# EAGLE board PCB_TA (EAGLE 9.6.2)
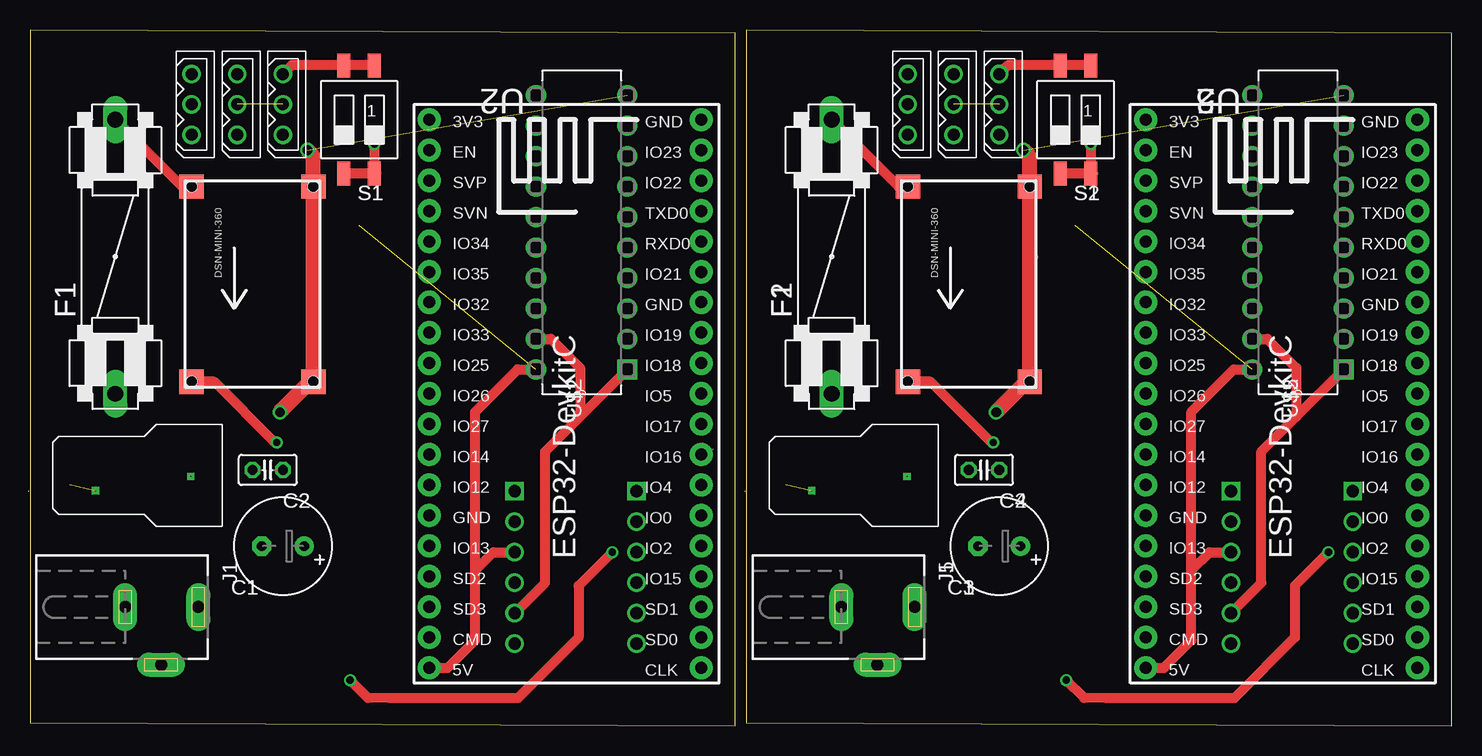
[diagram p0: board, top side]
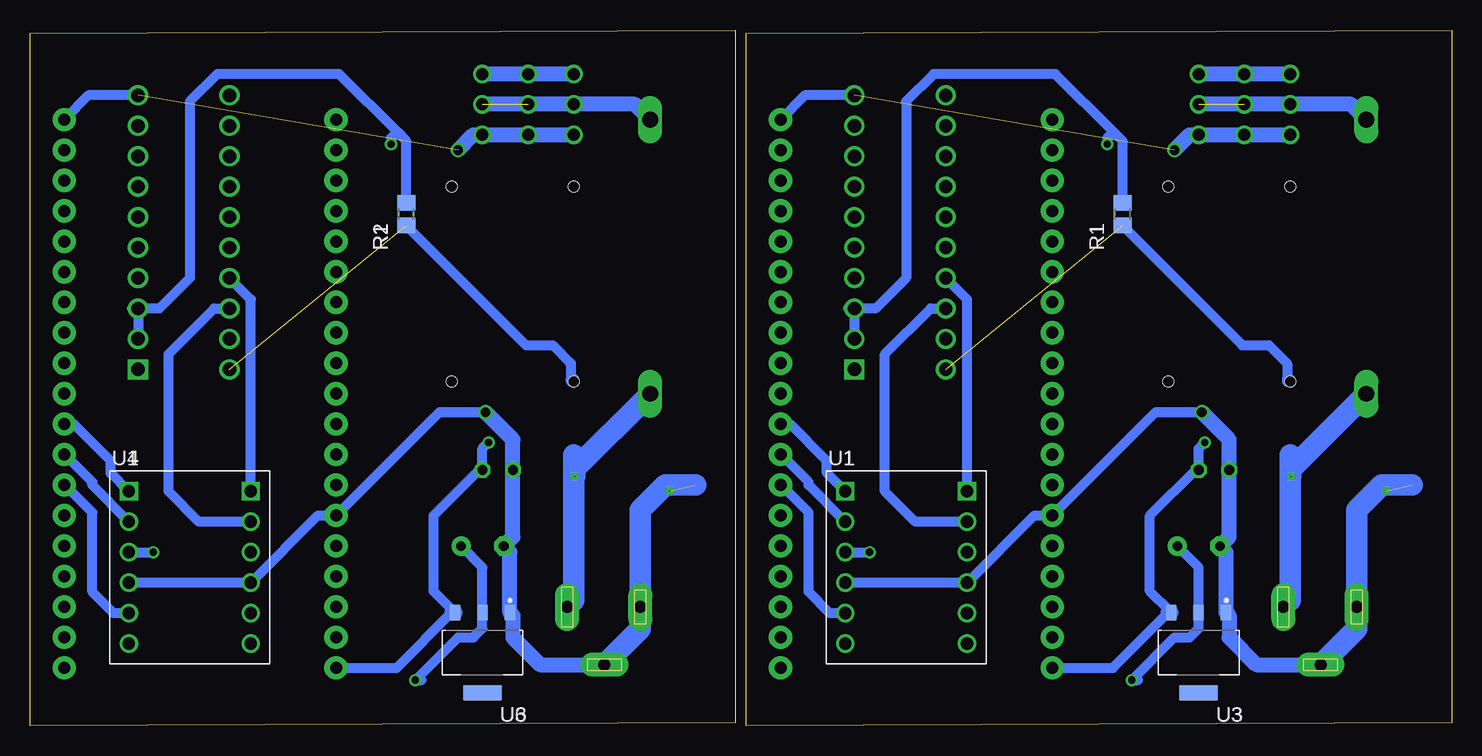
[diagram p1: board, bottom side, seen from below]

Size 118.48 x 58.02 mm. Coordinates in mm from the lower left corner, seen from the top.
Outline: 0,0.25 58.79,0 58.79,57.77 0,58.02 0,0.25
Outline: 59.69,0.25 118.48,0 118.48,57.77 59.69,58.02 59.69,0.25
Copper layers (1*16): Top 0.035mm / dielectric 1.5mm / Bottom 0.035mm
Design rules "default": minimum track width 6mil, minimum drill 0.35mm, track to track 6mil, track to pad 6mil, pad to pad 6mil, via to via 6mil, smd to smd 6mil, copper to edge 40mil, drill to drill 6mil, minimum pad ring 10mil, minimum via ring 8mil, stop-mask expansion 4mil, vias tented up to drill 0mil, thermal gap 10mil
Holes 0.9 mm at 13.46,28.7 13.46,44.96 23.62,44.96 23.62,28.7 73.15,28.7 73.15,44.96 83.31,44.96 83.31,28.7

## Footprints (pad centres in the part's own frame; a part is rotated, then mirrored left to right if it is on the bottom)
E3,5-8 = drill 0.813 pad 1.6: + -1.778,0 | drill 0.813 pad 1.6 octagon: - 1.778,0
C025-025X050 = drill 0.813 octagon: 1 -1.27,0; 2 1.27,0
FUSE = drill 1.321 long: 1 -11.43,0; 2 11.43,0
DCJ0202 = drill 1 pad 2 long: 1 0,3.1; 2 4.8,0; 3 0,-3
5267-3 = drill 1: 1 0,0; 2 -2.54,0; 3 -5.08,0
R0805 = smd 1.3 x 1.5: 1 -0.95,0; 2 0.95,0
SMS-002 = smd 1.092 x 2.007: 1 -1.27,-4.496; 2 1.27,-4.496; 3 1.27,4.496; 4 -1.27,4.496
CONV_BOB-12009 = drill 1.016: GND_1 5.08,-1.27; GND_2 -5.08,-1.27; HV 5.08,1.27; HV2 5.08,3.81; HV3 5.08,-3.81; HV4 5.08,-6.35; LV -5.08,1.27; LV2 -5.08,3.81; LV3 -5.08,-3.81; LV4 -5.08,-6.35 | drill 1.016 square: HV1 5.08,6.35; LV1 -5.08,6.35
DIP254P762X508-20 = drill 1.118 square: 1 -7.62,22.86 | drill 1.118: 2 -7.62,20.32; 3 -7.62,17.78; 4 -7.62,15.24; 5 -7.62,12.7; 6 -7.62,10.16; 7 -7.62,7.62; 8 -7.62,5.08; 9 -7.62,2.54; 10 -7.62,0; 11 0,0; 12 0,2.54; 13 0,5.08; 14 0,7.62; 15 0,10.16; 16 0,12.7; 17 0,15.24; 18 0,17.78; 19 0,20.32; 20 0,22.86
SOT229P700X180-4N = smd 0.93 x 1.31: 1 -2.29,-3.345; 2 0,-3.345; 3 2.29,-3.345 | smd 3.24 x 1.31: 4 0,3.345
T_PLUG_CONNECTOR = drill 0.1 square: P-1 2.6,4.35; P-2 10.55,5.55
ESP32-DEVKITC = drill 1 pad 1.93: 1 -22.87,-11.42; 2 -20.33,-11.42; 3 -17.79,-11.42; 4 -15.25,-11.42; 5 -12.71,-11.42; 6 -10.17,-11.42; 7 -7.63,-11.42; 8 -5.09,-11.42; 9 -2.55,-11.42; 10 -0.01,-11.42; 11 2.53,-11.42; 12 5.07,-11.42; 13 7.61,-11.42; 14 10.15,-11.42; 15 12.69,-11.42; 16 15.23,-11.42; 17 17.77,-11.42; 18 20.31,-11.42; 19 22.85,-11.42; 20 22.85,11.23; 21 20.31,11.23; 22 17.77,11.23; 23 15.23,11.23; 24 12.69,11.23; 25 10.15,11.23; 26 7.61,11.23; 27 5.07,11.23; 28 2.53,11.23; 29 -0.01,11.23; 30 -2.55,11.23; 31 -5.09,11.23; 32 -7.63,11.23; 33 -10.17,11.23; 34 -12.71,11.23; 35 -15.25,11.23; 36 -17.79,11.23; 37 -20.33,11.23; 38 -22.87,11.23
DC-DC_CONV = smd 2.032 x 2.032: 1 -5.08,8.128; 2 5.08,8.128; 3 -5.08,-8.128; 4 5.08,-8.128

## Placement (x,y rotation side)
C1  [E3,5-8]  21.08,14.99 180 top
C2  [C025-025X050]  19.81,21.34 180 top
C3  [E3,5-8]  80.77,14.99 180 top
C4  [C025-025X050]  79.5,21.34 180 top
F1  [FUSE]  7.11,39.12 90 top
F2  [FUSE]  66.8,39.12 90 top
J1  DCJ0202  [DCJ0202]  10.92,9.91 270 top
J2  22-03-5035  [5267-3]  13.46,49.28 270 top
J3  22-03-5035  [5267-3]  17.27,49.28 270 top
J4  22-03-5035  [5267-3]  21.08,49.28 270 top
J5  DCJ0202  [DCJ0202]  70.61,9.91 270 top
J6  22-03-5035  [5267-3]  73.15,49.28 270 top
J7  22-03-5035  [5267-3]  76.96,49.28 270 top
J8  22-03-5035  [5267-3]  80.77,49.28 270 top
R1  [R0805]  27.43,42.67 90 bottom
R2  [R0805]  87.12,42.67 90 bottom
S1  SWS002  [SMS-002]  27.43,50.55 180 top
S2  SWS002  [SMS-002]  87.12,50.55 180 top
U1  BOB-12009  [CONV_BOB-12009]  45.47,13.21 0 bottom
U2  SN74LS241N  [DIP254P762X508-20]  42.16,52.58 180 top
U3  AMS1117-3.3  [SOT229P700X180-4N]  21.08,6.1 180 bottom
U4  BOB-12009  [CONV_BOB-12009]  105.16,13.21 0 bottom
U5  SN74LS241N  [DIP254P762X508-20]  101.85,52.58 180 top
U6  AMS1117-3.3  [SOT229P700X180-4N]  80.77,6.1 180 bottom
U$1  T-PLUG_CONNECTOR  [T_PLUG_CONNECTOR]  16,25.15 180 top
U$2  ESP32DEVKITC  [ESP32-DEVKITC]  44.7,27.69 270 top
U$3  DC-DC_CONV  [DC-DC_CONV]  18.54,36.83 180 top
U$4  T-PLUG_CONNECTOR  [T_PLUG_CONNECTOR]  75.69,25.15 180 top
U$5  ESP32DEVKITC  [ESP32-DEVKITC]  104.39,27.69 270 top
U$6  DC-DC_CONV  [DC-DC_CONV]  78.23,36.83 180 top

## Library data of the parts
C1-C4 = rcl; SPICEPREFIX: C
F1 F2 = special
J1 J5 = con-jack; OC_FARNELL: unknown; OC_NEWARK: unknown
J2-J4 J6-J8 = molex
R1 R2 = rcl; SPICEPREFIX: R
S1 S2 = smd-special
U1 U4 = BOB-12009; AVAILABILITY: In Stock; DESCRIPTION: BSS138 Logic-Level Translator Interface Evaluation Board; MF: SparkFun; MP: BOB-12009; PACKAGE: None; PRICE: None; PURCHASE-URL: https://pricing.snapeda.com/search/part/BOB-12009/?ref=eda
U2 U5 = SN74LS241N; AVAILABILITY: In Stock; DESCRIPTION: 8-ch, 4.75-V to 5.25-V bipolar buffers with 3-state outputs; MF: Texas Instruments; MP: SN74LS241N; PACKAGE: PDIP-20 Texas Instruments; PRICE: None; PURCHASE-URL: https://pricing.snapeda.com/search/part/SN74LS241N/?ref=eda
U3 U6 = AMS1117-3.3; AVAILABILITY: Not in stock; DESCRIPTION: LDO Voltage Regulators 800MA LDO LINEAR REG; MF: Advanced Monolithic Systems; MP: AMS1117-3.3; PACKAGE: None; PRICE: None
U$1 U$4 = con-T-plug
U$2 U$5 = ESP32-DEVKITC
U$3 U$6 = devkrzyzanowskiLib

## Nets
3V1: C3.+ U4.LV U6.2
3V3: C1.+ U1.LV U3.2
5V: C2.1 R1.1 U1.HV U2.20 U3.3 U$2.19 U$3.2
5V1: C4.1 R2.1 U4.HV U5.20 U6.3 U$5.19 U$6.2
DATA: R1.2 S1.4 U2.2 U2.3
DATA1: R2.2 S2.4 U5.2 U5.3
DATA_P: J2.3 J3.3 J4.3 S1.1
DATA_P1: J6.3 J7.3 J8.3 S2.1
DXL_EN_A: U1.LV3 U$2.26
DXL_EN_A1: U4.LV3 U$5.26
DXL_EN_B: U1.HV3 U2.1 U2.19
DXL_EN_B1: U4.HV3 U5.1 U5.19
DXL_RX_A: U1.LV2 U$2.27
DXL_RX_A1: U4.LV2 U$5.27
DXL_RX_B: U1.HV2 U2.18
DXL_RX_B1: U4.HV2 U5.18
DXL_TX_A: U1.LV1 U$2.28
DXL_TX_A1: U4.LV1 U$5.28
DXL_TX_B: U1.HV1 U2.17
DXL_TX_B1: U4.HV1 U5.17
GND1: C3.- C4.2 J5.2 J5.3 J6.1 J7.1 J8.1 U4.GND_1 U4.GND_2 U5.10 U6.1 U$4.P-2 U$5.14 U$5.38 U$6.1 U$6.3
GND2: C1.- C2.2 J1.2 J1.3 J2.1 J3.1 J4.1 U1.GND_1 U1.GND_2 U2.10 U3.1 U$1.P-2 U$2.14 U$2.38 U$3.1 U$3.3
VCC: F1.2 J2.2 J3.2 J4.2 U$3.4
VCC1: F2.2 J6.2 J7.2 J8.2 U$6.4
VIN: F1.1 J1.1 U$1.P-1
VIN1: F2.1 J5.1 U$4.P-1

## Tracks (layer width: path | path; a pad name or v marks a point on that pad's centre or on a via)
3V1  (via drill 0.6)
  Top 0.813: v108.2,14.48 105.41,11.68 105.41,7.37 100.35,2.31 89.66,2.31 87.85,2.32 v86.36,3.81
  Bottom 0.813: U4.LV v108.2,14.48 | 85.85,3.81 v86.36,3.81 82.8,7.37 81.53,7.37 80.77,8.13 U6.2 80.77,13.21 C3.+
3V3  (via drill 0.6)
  Top 0.813: v48.51,14.48 45.72,11.68 45.72,7.37 40.66,2.31 29.97,2.31 28.16,2.32 v26.67,3.81
  Bottom 0.813: U1.LV v48.51,14.48 | 26.16,3.81 v26.67,3.81 23.11,7.37 21.84,7.37 21.08,8.13 U3.2 21.08,13.21 C1.+
5V  (via drill 0.6)  (1 unrouted)
  Top 0.813: v20.57,23.62 20.41,23.62 15.33,28.7 U$3.2 | U$2.19 34.81,4.84 37.08,7.11 37.08,12.95 | 37.08,12.95 38.61,14.48 U1.HV | 37.08,12.95 37.08,26.16 40.64,29.72 U2.20
  Bottom 0.813: U3.3 25.15,11.21 25.15,17.53 21.34,21.34 C2.1 21.08,23.11 v20.57,23.62 | U$2.19 28.23,4.84 23.63,9.44 | R1.1 17.46,31.75 15.24,31.75 13.72,30.23 13.72,28.96 | 13.72,28.96 13.72,28.7 U$3.2 13.46,28.96 13.72,28.96
  Bottom 1.27: 23.63,9.44 U3.3
5V1  (via drill 0.6)  (1 unrouted)
  Top 0.813: v80.26,23.62 80.1,23.62 75.02,28.7 U$6.2 | U$5.19 94.5,4.84 96.77,7.11 96.77,12.95 | 96.77,12.95 98.3,14.48 U4.HV | 96.77,12.95 96.77,26.16 100.33,29.72 U5.20
  Bottom 0.813: U6.3 84.84,11.21 84.84,17.53 81.03,21.34 C4.1 80.77,23.11 v80.26,23.62 | U$5.19 87.92,4.84 83.32,9.44 | R2.1 77.15,31.75 74.93,31.75 73.41,30.23 73.41,28.96 | 73.41,28.96 73.41,28.7 U$6.2 73.15,28.96 73.41,28.96
  Bottom 1.27: 83.32,9.44 U6.3
DATA  (via drill 0.6)
  Top 0.813: S1.4 28.88,46.05 | S1.4 26.34,46.05 26.16,46.23 26.29,46.35 26.54,46.1 | v28.7,48.51 S1.4
  Bottom 0.813: U2.3 U2.2 | U2.3 48.01,34.8 45.47,37.34 45.47,52.07 43.18,54.36 33.02,54.36 28.19,49.53 | 50.29,34.8 U2.3 | R1.2 27.43,48.77 28.19,49.53 | 28.19,49.53 28.7,49.02 v28.7,48.51
DATA1  (via drill 0.6)
  Top 0.813: S2.4 88.57,46.05 | S2.4 86.03,46.05 85.85,46.23 85.98,46.35 86.23,46.1 | v88.39,48.51 S2.4
  Bottom 0.813: U5.3 U5.2 | U5.3 107.7,34.8 105.16,37.34 105.16,52.07 102.87,54.36 92.71,54.36 87.88,49.53 | 109.98,34.8 U5.3 | R2.2 87.12,48.77 87.88,49.53 | 87.88,49.53 88.39,49.02 v88.39,48.51
DATA_P
  Top 0.813: J4.3 21.84,55.12 28.63,55.12 S1.1
  Bottom 1.27: J2.3 J3.3 J4.3
DATA_P1
  Top 0.813: J8.3 81.53,55.12 88.32,55.12 S2.1
  Bottom 1.27: J6.3 J7.3 J8.3
DXL_EN_A
  Bottom 0.813: U1.LV3 51.82,9.4 53.59,11.18 53.59,17.78 55.89,20.08 U$2.26
DXL_EN_A1
  Bottom 0.813: U4.LV3 111.51,9.4 113.28,11.18 113.28,17.78 115.58,20.08 U$5.26
DXL_EN_B
  Top 0.813: U1.HV3 42.93,11.94 42.93,22.86 45.85,25.78 | 45.85,25.78 U2.1 | U2.19 43.43,32.26 45.85,29.85 45.85,25.78
DXL_EN_B1
  Top 0.813: U4.HV3 102.62,11.94 102.62,22.86 105.54,25.78 | 105.54,25.78 U5.1 | U5.19 103.12,32.26 105.54,29.85 105.54,25.78
DXL_RX_A
  Bottom 0.813: U1.LV2 53.59,20.07 53.59,20.32 55.89,22.62 U$2.27
DXL_RX_A1
  Bottom 0.813: U4.LV2 113.28,20.07 113.28,20.32 115.58,22.62 U$5.27
DXL_RX_B
  Bottom 0.813: U1.HV2 44.7,17.02 47.24,19.56 47.24,30.99 43.43,34.8 U2.18
DXL_RX_B1
  Bottom 0.813: U4.HV2 104.39,17.02 106.93,19.56 106.93,30.99 103.12,34.8 U5.18
DXL_TX_A
  Bottom 0.813: U1.LV1 52.07,21.08 52.07,22.1 55.13,25.16 U$2.28
DXL_TX_A1
  Bottom 0.813: U4.LV1 111.76,21.08 111.76,22.1 114.82,25.16 U$5.28
DXL_TX_B
  Bottom 0.813: U1.HV1 40.39,35.56 U2.17
DXL_TX_B1
  Bottom 0.813: U4.HV1 100.08,35.56 U5.17
GND1  (via drill 0.8)  (2 unrouted)
  Top 0.813: 83.57,39.12 83.31,38.86
  Top 1.27: v80.52,26.16 83.06,28.7 U$6.1 83.31,38.86 U$6.3 83.31,47.5 v82.8,48.01
  Bottom 0.813: v80.52,26.16 84.35,26.16 U$5.14 94.48,17.54 U4.GND_1 U4.GND_2 | U5.10 113.6,52.58 U$5.38
  Bottom 1.27: J6.1 J7.1 J8.1 81.53,49.28 v82.8,48.01 | J5.2 75.97,5.11 78.23,7.37 78.23,9.19 U6.1 78.48,14.47 C3.- 78.23,15.75 C4.2 78.23,23.88 v80.52,26.16
  Bottom 1.778: 62.99,20.07 65.53,20.07 67.61,17.99 J5.3 67.61,8.11 J5.2
GND2  (via drill 0.8)  (2 unrouted)
  Top 0.813: 23.88,39.12 23.62,38.86
  Top 1.27: v20.83,26.16 23.37,28.7 U$3.1 23.62,38.86 U$3.3 23.62,47.5 v23.11,48.01
  Bottom 0.813: v20.83,26.16 24.66,26.16 U$2.14 34.79,17.54 U1.GND_1 U1.GND_2 | U2.10 53.91,52.58 U$2.38
  Bottom 1.27: J2.1 J3.1 J4.1 21.84,49.28 v23.11,48.01 | J1.2 16.28,5.11 18.54,7.37 18.54,9.19 U3.1 18.79,14.47 C1.- 18.54,15.75 C2.2 18.54,23.88 v20.83,26.16
  Bottom 1.778: 3.3,20.07 5.84,20.07 7.92,17.99 J1.3 7.92,8.11 J1.2
VCC  (1 unrouted)
  Top 0.813: U$3.4 12.7,44.96 F1.2
  Bottom 1.27: J4.2 J2.2 8.38,51.82 F1.2
VCC1  (1 unrouted)
  Top 0.813: U$6.4 72.39,44.96 F2.2
  Bottom 1.27: J8.2 J6.2 68.07,51.82 F2.2
VIN
  Bottom 1.778: J1.1 13.46,10.47 13.46,21.34 | U$1.P-1 13.4,22.55 13.46,22.61 13.46,21.34 | F1.1 13.46,21.34
VIN1
  Bottom 1.778: J5.1 73.15,10.47 73.15,21.34 | U$4.P-1 73.09,22.55 73.15,22.61 73.15,21.34 | F2.1 73.15,21.34

## Text on the board
_tPlace: U$2 | U$2
_tNames: U2 | U2 | S1 | S1 | F1 | F1 | C2 | C2 | J1 | J1 | C1 | C1
_bNames: R1 | R1 | U1 | U1 | U3 | U3